# Altium PCB PCB_Exp_INDRA.PcbDoc
Units mil, origin at the board's own origin, x right, y up, seen from the top; angles counter-clockwise.
Board outline 1815 x 2261.8 mil, 2 copper layers (Top Layer, Bottom Layer); 53 components, 38 nets, 233 pads, 30 vias.
Unrouted connection lines stored in the file: 2.
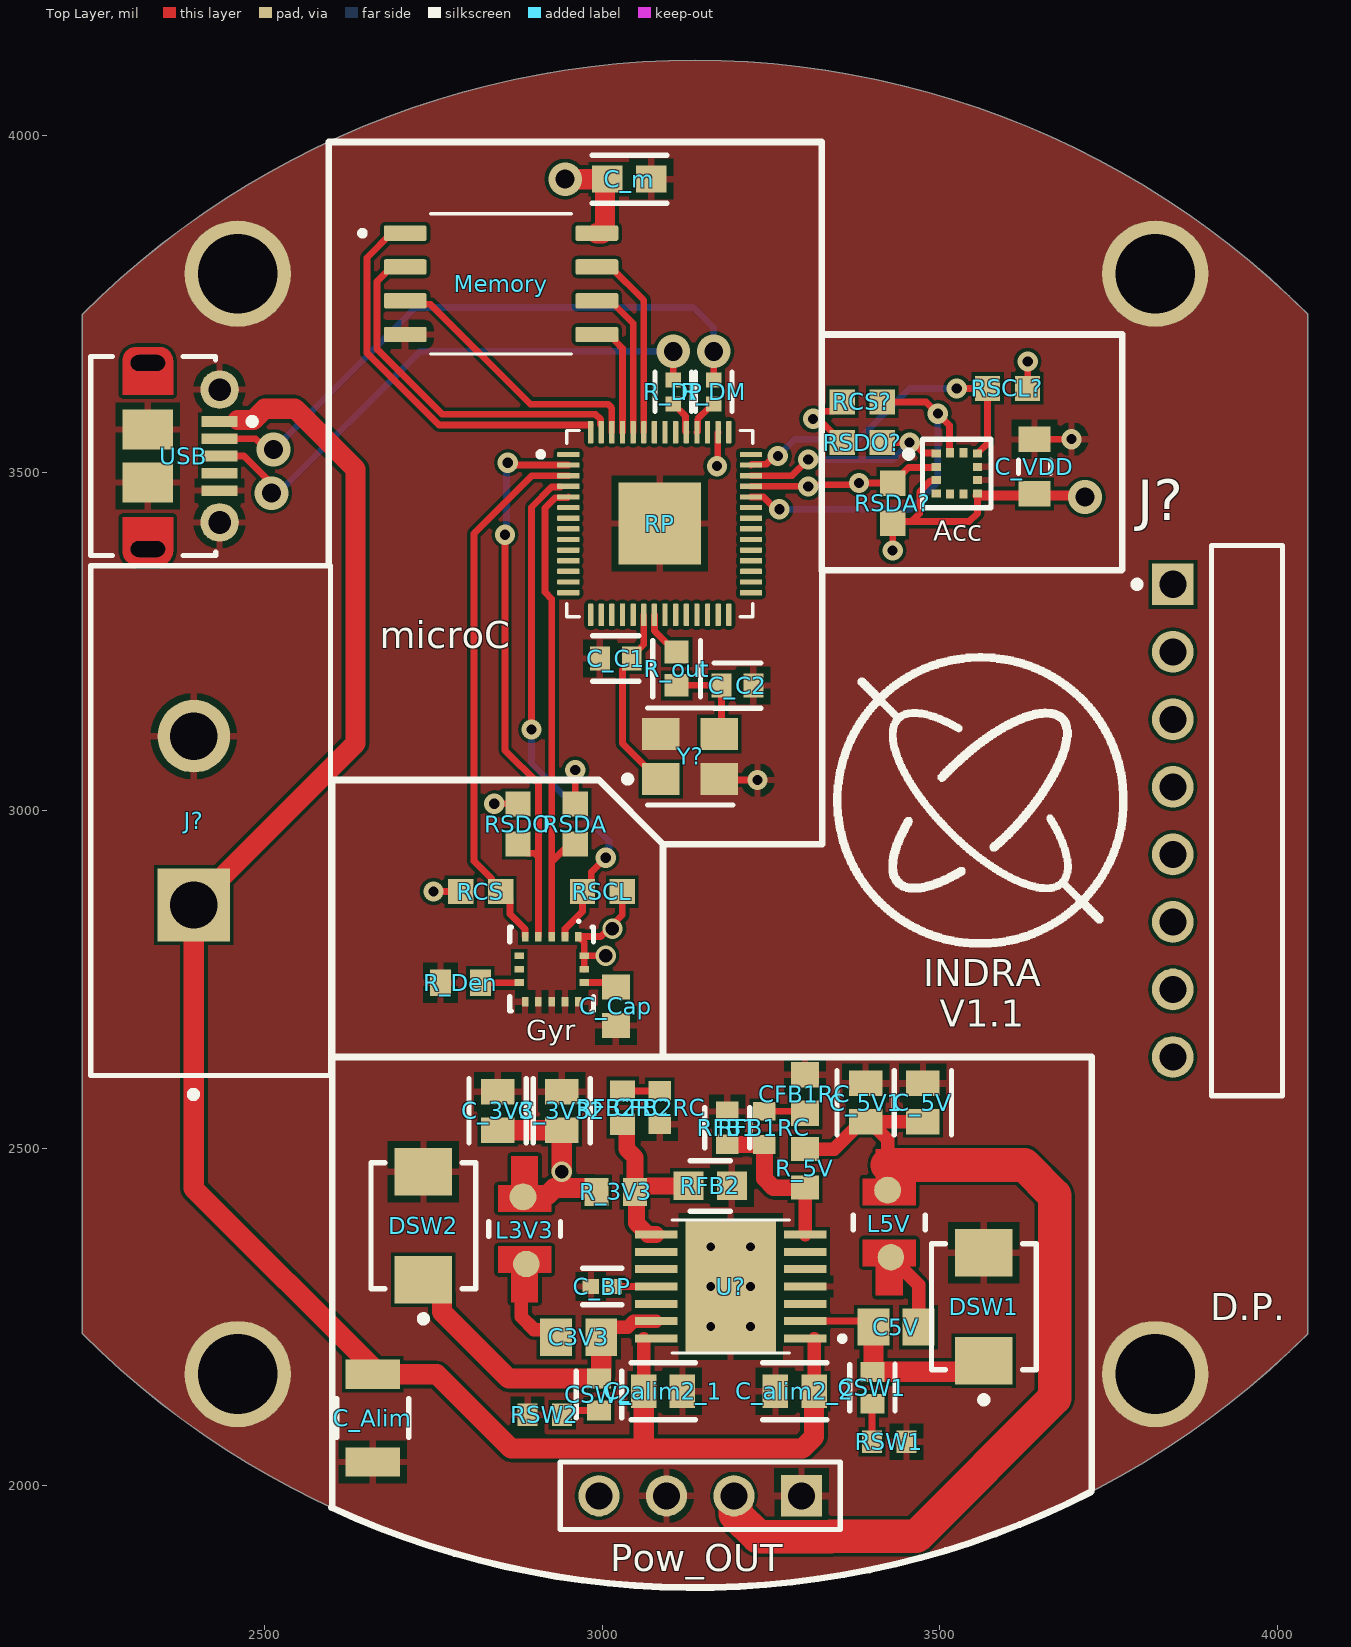
[diagram p0: Top Layer view]
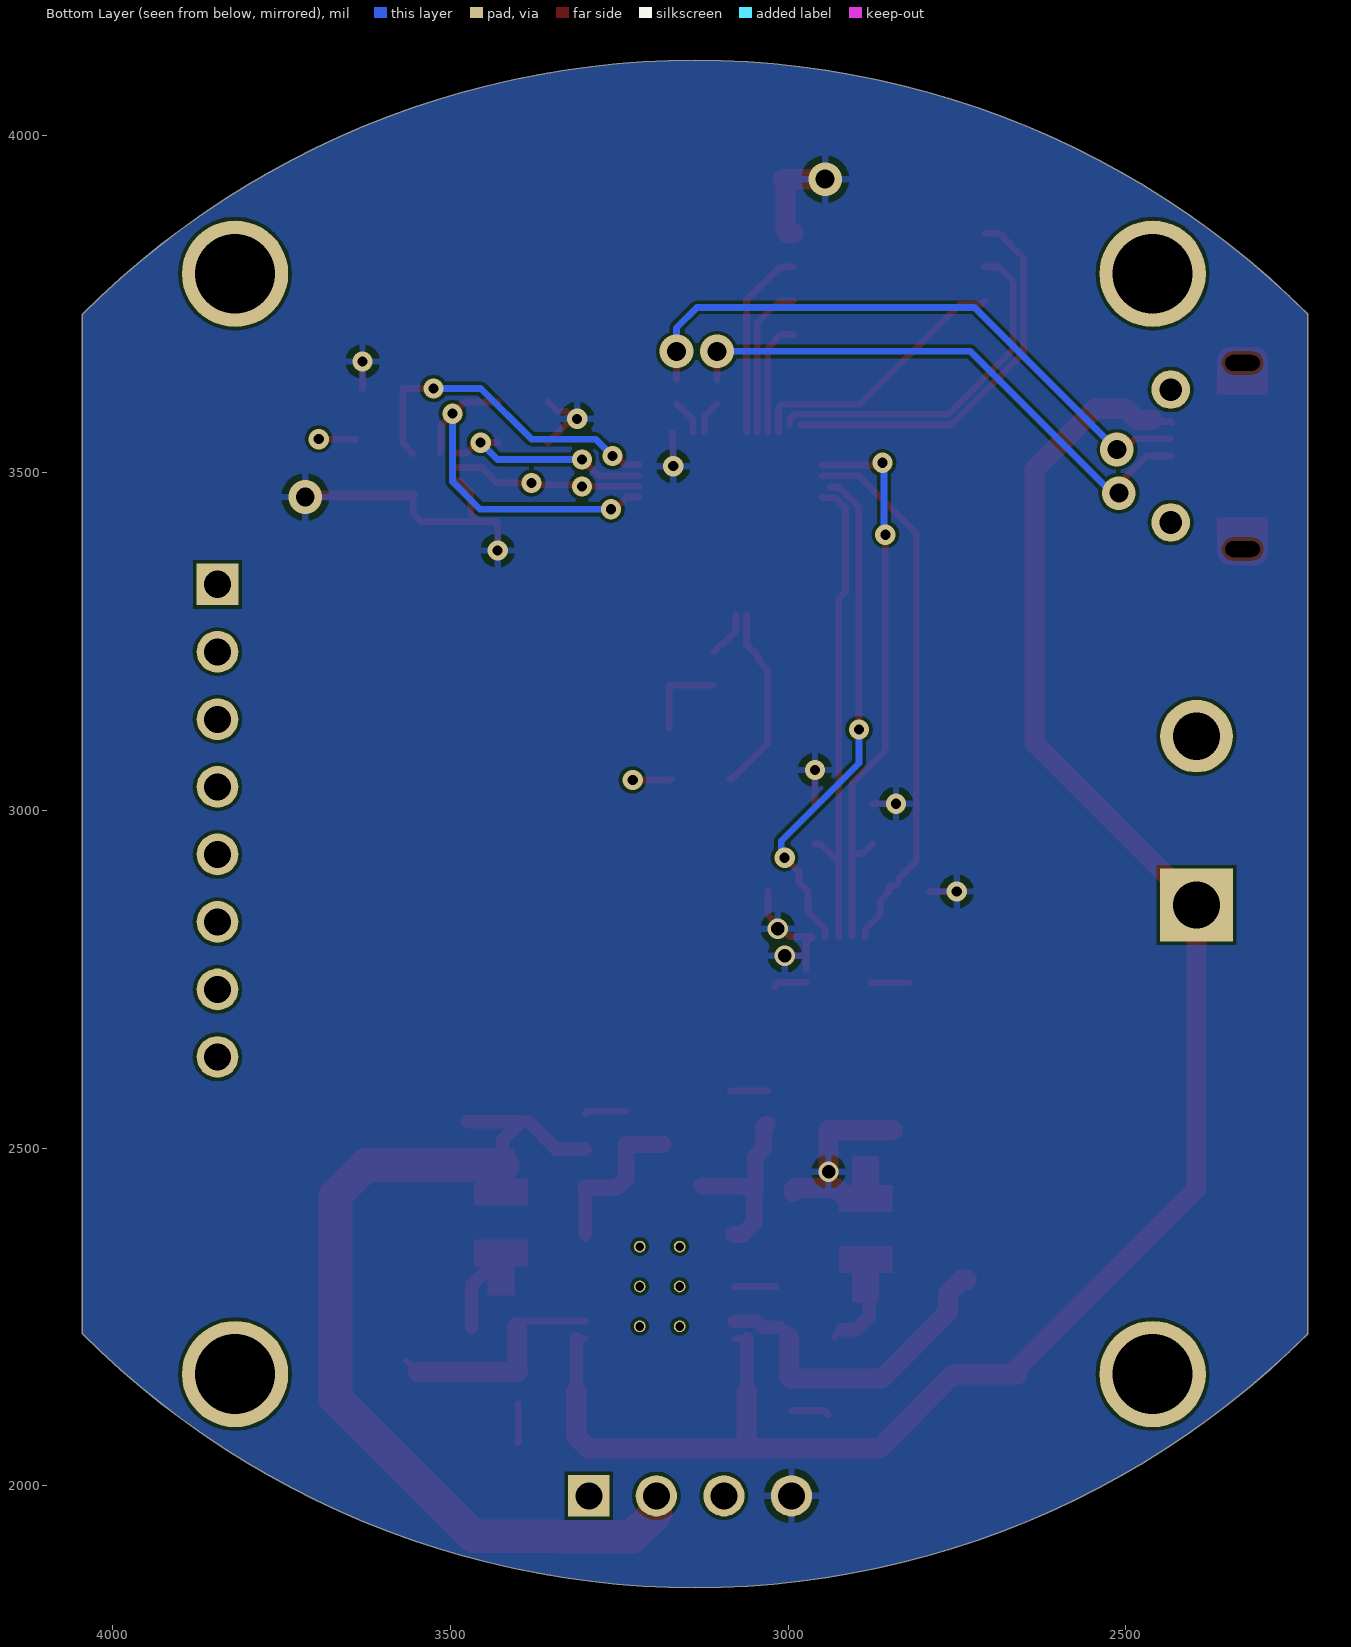
[diagram p1: Bottom Layer view, seen from below]
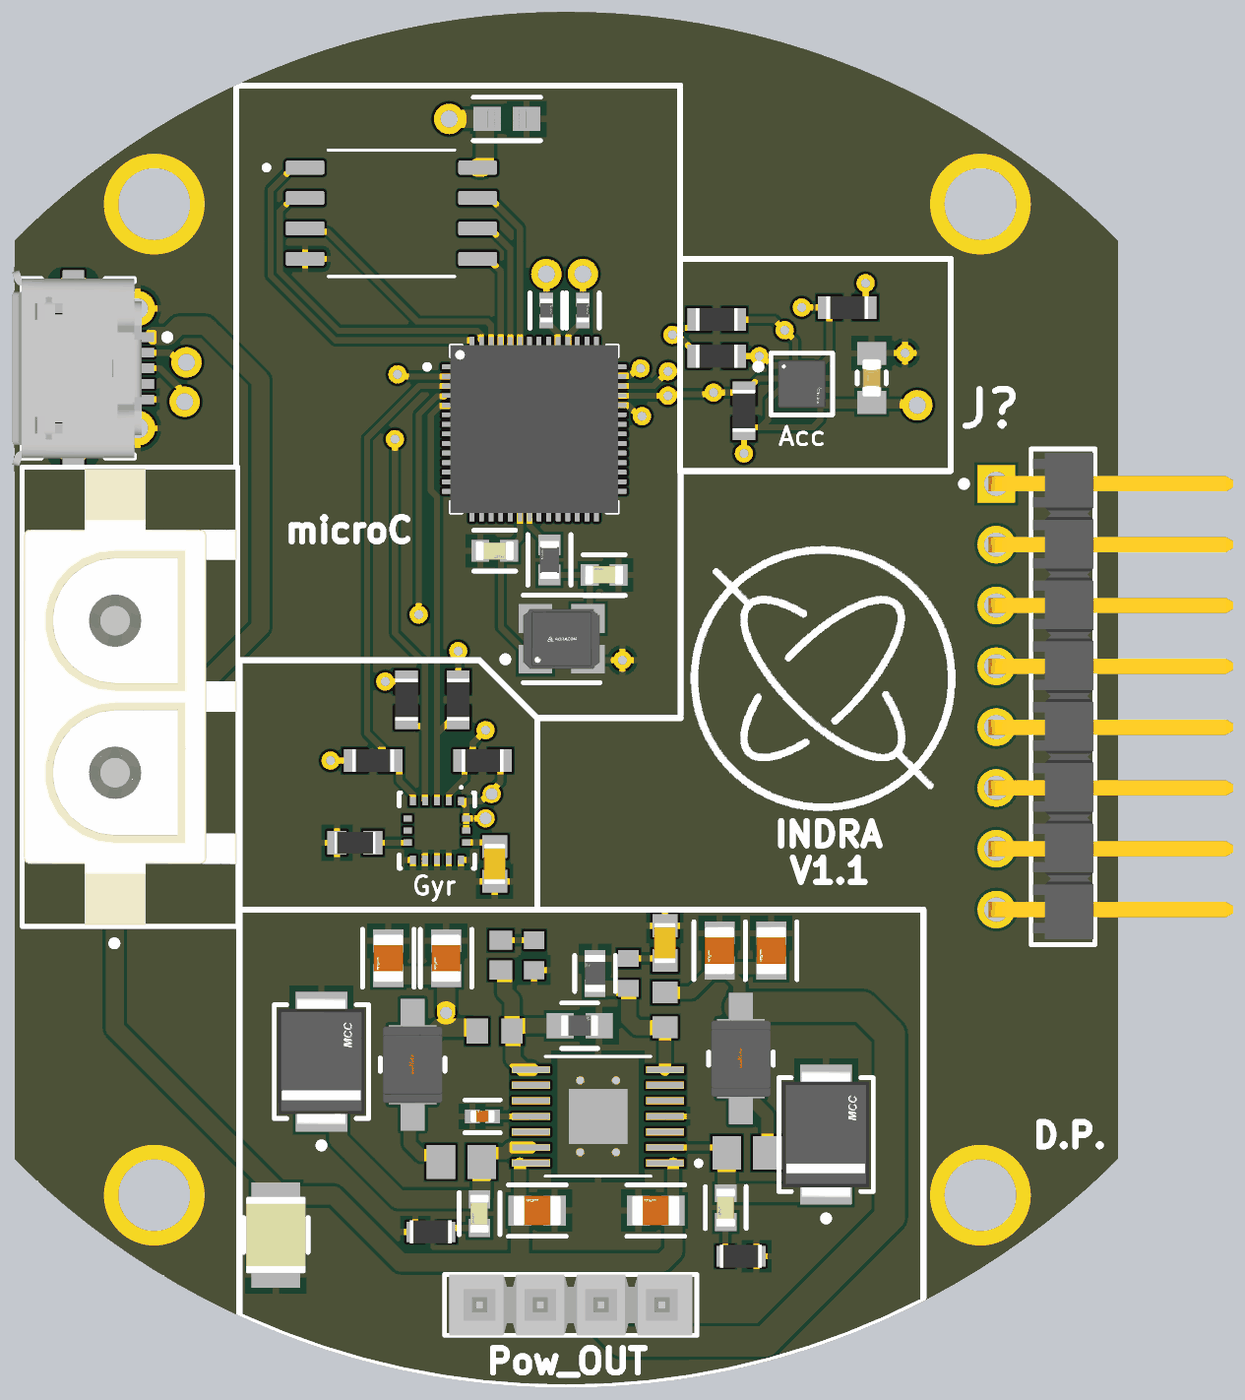
[diagram p2: 3D render of the assembled board from above, using the file's embedded part models]

## Layer stack, top to bottom
Top Solder: solder mask 0.4, Solder Resist, Dk 3.5
Top Layer: signal copper 1.4
Dielectric 1: dielectric 12.6, FR-4, Dk 4.8
Bottom Layer: signal copper 1.4
Bottom Solder: solder mask 0.4, Solder Resist, Dk 3.5

## Board outline
2230,2225 2230,3735 cw(c3137.5,2827.5) 4045,3735 4045,2225 cw(c3137.5,3132.5)

## Design rules (kind name [scope] priority, off if disabled: settings)
Clearance [All] p1: gap=5 ignorepadtopadclearanceinfootprint=FALSE
DiffPairsRouting [All] p1: maxlimit=10 minlimit=5 mostfreqgap=5 toplayer_minwidth=15 toplayer_maxwidth=15 toplayer_prefwidth=15 bottomlayer_minwidth=15 bottomlayer_maxwidth=15 bottomlayer_prefwidth=15 maxuncoupledlength=500
PolygonConnect [All] p1: connectstyle=Relief reliefconductorwidth=10 reliefentries=4 polygonreliefangle="90 Angle" airgapwidth=10
RoutingVias [All] p1: holewidth=28 width=50 viastyle="Through Hole" minholewidth=28 minwidth=50 maxholewidth=28 maxwidth=50
SolderMaskExpansion [All] p1: expansion=4 istentingtop=FALSE
Width [All] p1: maxlimit=50 minlimit=10 preferedwidth=10
29 further rules are at their usual default settings.

## Components (designator, comment, footprint, x,y, rotation, side; value= is the part's Value field where it differs from the comment)
Acc "BMA400" FP-BMA400-MFG 3525,3499.18 r0 top
C3V3 "GRM219R71H333KA01D" CAPC2013X95X45NL10T25 2965,2220 r180 top
C5V "GRM219R71H333KA01D" CAPC2013X95X45NL10T25 3435,2235 r0 top
C_3V3 "GRM21BR61C106KE15L" FP-GRM21B-0_1-IPC_C 2845,2555 r270 top
C_3V32 "GRM21BR61C106KE15L" FP-GRM21B-0_1-IPC_C 2940,2555 r270 top
C_5V "GRM21BR61C106KE15L" FP-GRM21B-0_1-IPC_C 3474.85,2567.48 r270 top
C_5V1 "GRM21BR61C106KE15L" FP-GRM21B-0_1-IPC_C 3389.85,2567.48 r270 top
C_Alim "GRM32ER60J107ME20L" FP-GRM32-0_3-MFG 2660,2100 r270 top value=100uF
C_alim2_1 "GRM21BR61C106KE15L" FP-GRM21B-0_1-IPC_C 3090,2140 r180 top
C_alim2_2 "GRM21BR61C106KE15L" FP-GRM21B-0_1-IPC_C 3285,2140 r180 top
C_BP "GRM155R60J475ME47D" FP-GRM155-0_1-IPC_B 3000,2295 r180 top
C_C1 "C0603C270J5GACTU" FP-C0603C-CF-MFG 3020,3225 r180 top value="27 pF"
C_C2 "C0603C270J5GACTU" FP-C0603C-CF-MFG 3200,3185 r0 top value="27 pF"
C_Cap "GRM188R71H103KA01D" CAPC1608X90X35ML10T15 3020,2710 r270 top
C_m "CL10B104KB8NNND" FP-CL10-IPC_A 3040,3935 r0 top
C_VDD "CGA3E2X7R1H104K080AA" FP-CGA3E-0_3-0_1-IPC_A 3640,3509.18 r90 top
CFB1RC "GRM188R71H103KA01D" CAPC1608X90X35ML10T15 3300,2580 r270 top
CFB2RC "GRM188R71H682KA01D" CAPC1608X90X35LL10T15 3085,2560 r270 top
CSW1 "C0603C471K5RACTU" FP-C0603C-CF-MFG 3400,2145 r90 top value="470 pF"
CSW2 "C0603C471K5RACTU" FP-C0603C-CF-MFG 2995,2135 r90 top value="470 pF"
DSW1 "SK36B-TP" FP-DO-214AA-MFG 3565,2265 r90 top
DSW2 "SK36B-TP" FP-DO-214AA-MFG 2735,2385 r90 top
Gyr "L3GD20H" STM-LGA-16 2925,2765 r270 top
J? "TSW-108-08-T-S-RA" FP-TSW-108-08-T-S-RA-MFG 3954.84,2985 r90 top
J? "350428-1" FP-350428-1-MFG 2420,2985 r90 top
L3V3 "LQH32CN220K23L" FP-LQH32CH_23-MFG 2885,2380 r90 top
L5V "LQH32CN220K23L" FP-LQH32CH_23-MFG 3425,2390 r90 top
Memory "W25Q128JVSIQ" SOIC127P790X216-8N 2850,3780 r0 top
Pow_OUT "TSW-104-08-G-S" SMTC-TSW-104-08-X-S 3295,1985 r180 top
R_3V3 "ERJ-3EKF2002V" RESC1608X55X30ML15T15 3020,2435 r0 top
R_5V "ERJ-3EKF2002V" RESC1608X55X30ML15T15 3300,2470 r90 top
R_Den "Resistor 100k +/-1% 0603 100 mW" RESC1608X55X25ML10T15 2790,2745 r0 top value=100k
R_DM "ERJ-2RKF27R0X" FP-ERJ2R-IPC_B 3165,3620 r90 top
R_DP "ERJ-2RKF27R0X" FP-ERJ2R-IPC_B 3105,3620 r90 top
R_out "ERA-3AEB102V" FP-ERA3A-IPC_C 3110,3210 r90 top
RCS "ERJ-3EKF4701V" RESC1608X55X30NL15T15 2820,2880 r180 top
RCS? "ERJ-3EKF4701V" RESC1608X55X30NL15T15 3385,3605 r180 top
RFB1 "CRCW06033K83FKEA" FP-CRCW0603-e3-IPC_C 3185,2530 r90 top
RFB1RC "ERJ-3EKF4220V" RESC1608X55X30LL15T15 3240,2530 r90 top
RFB2 "CRCW06036K34FKEA" FP-CRCW0603-e3-IPC_A 3159.76,2444.09 r0 top
RFB2RC "CRCW0603698RFKEA" RESC1609X50X30NL10T20 3030,2560 r90 top
RP "RP2040" QFN40P700X700X90-57N 3085,3425 r0 top
RSCL "ERJ-3EKF4701V" RESC1608X55X30NL15T15 3000,2880 r0 top
RSCL? "ERJ-3EKF4701V" RESC1608X55X30NL15T15 3600,3625 r0 top
RSDA "ERJ-3EKF4701V" RESC1608X55X30NL15T15 2960,2980 r90 top
RSDA? "ERJ-3EKF4701V" RESC1608X55X30NL15T15 3430,3455 r270 top
RSDO "ERJ-3EKF4701V" RESC1608X55X30NL15T15 2875,2980 r90 top
RSDO? "ERJ-3EKF4701V" RESC1608X55X30NL15T15 3385,3545 r180 top
RSW1 "ERJ3EKF1002V" RESC1609X55X30LL15T15 3425,2065 r180 top
RSW2 "ERJ3EKF1002V" RESC1609X55X30LL15T15 2915,2105 r0 top
U? "TPS54283PWPR" IC_TPS27S100BPWPR 3190,2295 r180 top
USB "105017-0001" USB-MICRO-B_V 2380,3525 r270 top
Y? "ABM8G-12.000MHZ-18-D2Y-T" FP-ABM8G-MFG 3130,3080 r0 top

## Footprints (in the part's own frame and the unit in brackets; to place one, negate y for a bottom-side part, rotate by r counter-clockwise, add the part's x,y. Pads: shape width x height; smd on the part's side, far side on the other; paste and mask are expansions set on the pad)
CAPC1608X90X35LL10T15 [mm] "Chip Capacitor, 2-Leads, Body 1.60x0.80mm, IPC High Density"
  rect 0.75x0.85 smd: 1(-0.625,0) 2(0.625,0)
  body extent -0.85,-0.45 0.85,0.45, height 0.9
CAPC1608X90X35ML10T15 [mm] "Chip Capacitor, 2-Leads, Body 1.7x0.9mm, IPC Low Density"
  rect 0.95x1.05 smd: 1(-0.725,0) 2(0.725,0)
  body extent -0.85,-0.45 0.85,0.45, height 0.9
CAPC2013X95X45NL10T25 [mm] "Chip Capacitor, 2-Leads, Body 2.00x1.25mm, IPC Medium Density"
  rect 1.2x1.4 smd: 1(-0.85,0) 2(0.85,0)
  body extent -1.05,-0.67 1.05,0.67, height 0.95
FP-350428-1-MFG [mm]
  rect 2.73x2.73 hole 1.78 paste-1000 mask+0: 1(-3.175,0.635)
  round 2.73 hole 1.78 paste-1000 mask+0: 2(3.175,0.635)
  silkscreen extent -10.42,-4.51 9.59,4.51, body extent -9.69,-4.61 9.69,4.61, height 0.25
FP-ABM8G-MFG [mm]
  rect 1.4x1.2 smd paste+0 mask+0: 1(-1.1,-0.85) 2(1.1,-0.85) 3(1.1,0.85) 4(-1.1,0.85)
  silkscreen extent -2.47,-1.83 1.6,1.83, body extent -1.9,-1.55 1.9,1.55, height 0.25
FP-BMA400-MFG [mm]
  rect 0.35x0.3 smd paste-1000 mask-1000: 1(-0.775,0.75) 2(-0.775,0.25) 3(-0.775,-0.25) 4(-0.775,-0.75) 7(0.775,-0.75) 8(0.775,-0.25) 9(0.775,0.25) 10(0.775,0.75)
  rect 0.3x0.35 smd paste-1000 mask-1000: 5(-0.25,-0.775) 6(0.25,-0.775) 11(0.25,0.775) 12(-0.25,0.775)
  silkscreen extent -1.94,-1.29 1.29,1.29, body extent -1.54,-1.54 1.54,1.54, height 0.25
FP-C0603C-CF-MFG [mm]
  rect 0.75x0.9 smd paste+0 mask+0: 1(-0.6,0) 2(0.6,0)
  silkscreen extent -0.87,-0.85 0.88,0.85, body extent -1.2,-0.6 1.2,0.6, height 0.25
FP-CGA3E-0_3-0_1-IPC_A [mm]
  rect 0.956x1.206 smd paste+0 mask+0: 1(-1.025,0) 2(1.025,0)
  silkscreen extent -0.25,-0.6 0.25,0.6, body extent -2,-1.1 2,1.1, height 0.25
FP-CL10-IPC_A [mil]
  rect 45.6x39.85 smd paste+0 mask+0: 1(-32.56,0) 2(32.56,0)
  silkscreen extent -55,-36 55,36, body extent -75,-40 75,40, height 10
FP-CRCW0603-e3-IPC_A [mil]
  rect 44.69x41.82 smd paste+0 mask+0: 1(-32.1,0) 2(32.1,0)
  silkscreen extent -30,-37 30,37, body extent -74,-41 74,41, height 10
FP-CRCW0603-e3-IPC_C [mil]
  rect 28.94x33.94 smd paste+0 mask+0: 1(-24.23,0) 2(24.23,0)
  silkscreen extent -30,-33 30,33, body extent -43,-23 43,23, height 10
FP-DO-214AA-MFG [mil]
  rect 70x85 smd paste+0 mask+0: 1(-80,0) 2(80,0)
  silkscreen extent -143,-78 94,78, body extent -119,-81 119,81, height 10
FP-ERA3A-IPC_C [mil]
  rect 33.66x35.68 smd paste+0 mask+0: 1(-24.63,0) 2(24.63,0)
  silkscreen extent -41,-35 41,35, body extent -45,-24 45,24, height 10
FP-ERJ2R-IPC_B [mil]
  rect 22.37x22.54 smd paste+0 mask+0: 1(-17.8,0) 2(17.8,0)
  silkscreen extent -29,-27 29,27, body extent -35,-17 35,17, height 10
FP-GRM21B-0_1-IPC_C [mil]
  rect 37.71x49.69 smd paste+0 mask+0: 1(-28.63,0) 2(28.63,0)
  silkscreen extent -47,-42 47,42, body extent -51,-31 51,31, height 10
FP-GRM32-0_3-MFG [mm]
  rect 1.1x2.05 smd paste+0 mask+0: 1(-1.65,0) 2(1.65,0)
  silkscreen extent -0.72,-1.35 0.72,1.35, body extent -2.3,-1.45 2.3,1.45, height 0.25
FP-GRM155-0_1-IPC_B [mil]
  rect 24.23x22.54 smd paste+0 mask+0: 1(-16.87,0) 2(16.87,0)
  silkscreen extent -29,-27 29,27, body extent -35,-17 35,17, height 10
FP-LQH32CH_23-MFG [mil]
  round 39.16 smd paste+0 mask+0: 1(-51.67,-2.46)
  round 39.86 smd paste+0 mask+0: 2(47.74,2.46)
  Top Layer region: 25.59,-39.37 25.59,39.37 64.96,39.37 64.96,19.68 108.27,19.68 108.27,-19.68 64.96,-19.68 64.96,-39.37
  Top Layer region: -64.96,-39.37 -64.96,-19.68 -108.27,-19.68 -108.27,19.68 -64.96,19.68 -64.96,39.37 -25.59,39.37 -25.59,-39.37
  silkscreen extent -11,-53 11,53, body extent -112,-57 112,57, height 10
FP-TSW-108-08-T-S-RA-MFG [mm]
  rect 1.57x1.57 hole 1.02 paste-1000 mask+0: 1(8.89,2.79)
  round 1.57 hole 1.02 paste-1000 mask+0: 2(6.35,2.79) 3(3.81,2.79) 4(1.27,2.79) 5(-1.27,2.79) 6(-3.81,2.79) 7(-6.35,2.79) 8(-8.89,2.79)
  silkscreen extent -10.35,-1.34 10.35,4.26, body extent -10.45,-7.47 10.45,3.67, height 0.25
IC_TPS27S100BPWPR [mm]
  rect 1.6x0.3 smd paste-2: 1(-2.8,1.95) 2(-2.8,1.3) 3(-2.8,0.65) 4(-2.8,0) 5(-2.8,-0.65) 6(-2.8,-1.3) 7(-2.8,-1.95) 8(2.8,-1.95) 9(2.8,-1.3) 10(2.8,-0.65) 11(2.8,0) 12(2.8,0.65) 13(2.8,1.3) 14(2.8,1.95)
  rect 3.4x5 smd paste-3 mask+0: 15(0,0)
  round 0.44 hole 0.33 mask+0: 16(-0.75,1.5) 17(0.75,1.5) 20(-0.75,-1.5) 21(0.75,-1.5)
  round 0.44 hole 0.33: 18(-0.75,0) 19(0.75,0)
  silkscreen extent -4.3,-2.5 2.2,2.5
QFN40P700X700X90-57N [mm]
  rrect25% 0.84x0.2 smd: 1(-3.435,2.6) 2(-3.435,2.2) 3(-3.435,1.8) 4(-3.435,1.4) 5(-3.435,1) 6(-3.435,0.6) 7(-3.435,0.2) 8(-3.435,-0.2) 9(-3.435,-0.6) 10(-3.435,-1) 11(-3.435,-1.4) 12(-3.435,-1.8) 13(-3.435,-2.2) 14(-3.435,-2.6) 29(3.435,-2.6) 30(3.435,-2.2) 31(3.435,-1.8) 32(3.435,-1.4) 33(3.435,-1) 34(3.435,-0.6) 35(3.435,-0.2) 36(3.435,0.2) 37(3.435,0.6) 38(3.435,1) 39(3.435,1.4) 40(3.435,1.8) 41(3.435,2.2) 42(3.435,2.6)
  rrect25% 0.2x0.84 smd: 15(-2.6,-3.435) 16(-2.2,-3.435) 17(-1.8,-3.435) 18(-1.4,-3.435) 19(-1,-3.435) 20(-0.6,-3.435) 21(-0.2,-3.435) 22(0.2,-3.435) 23(0.6,-3.435) 24(1,-3.435) 25(1.4,-3.435) 26(1.8,-3.435) 27(2.2,-3.435) 28(2.6,-3.435) 43(2.6,3.435) 44(2.2,3.435) 45(1.8,3.435) 46(1.4,3.435) 47(1,3.435) 48(0.6,3.435) 49(0.2,3.435) 50(-0.2,3.435) 51(-0.6,3.435) 52(-1,3.435) 53(-1.4,3.435) 54(-1.8,3.435) 55(-2.2,3.435) 56(-2.6,3.435)
  rect 3.1x3.1 smd paste-0.57: 57(0,0)
  silkscreen extent -4.57,-3.5 3.5,3.5, body extent -3.5,-3.5 3.5,3.5, height 0.9
RESC1608X55X25ML10T15 [mm] "Chip Resistor, 2-Leads, Body 1.70x0.90mm, IPC Low Density"
  rect 0.8x1 smd: 1(-0.75,0) 2(0.75,0)
  body extent -0.85,-0.45 0.85,0.45, height 0.55
RESC1608X55X30LL15T15 [mm] "Chip Resistor, 2-Leads, Body 1.60x0.80mm, IPC High Density"
  rect 0.7x0.85 smd: 1(-0.625,0) 2(0.625,0)
  body extent -0.87,-0.48 0.87,0.48, height 0.55
RESC1608X55X30ML15T15 [mm] "Chip Resistor, 2-Leads, Body 1.60x0.80mm, IPC Low Density"
  rect 0.9x1.05 smd: 1(-0.725,0) 2(0.725,0)
  body extent -0.87,-0.48 0.87,0.48, height 0.55
RESC1608X55X30NL15T15 [mm] "Chip Resistor, 2-Leads, Body 1.75x0.95mm, IPC Medium Density"
  rect 0.95x0.95 smd: 1(-0.75,0) 2(0.75,0)
  body extent -0.87,-0.48 0.87,0.48, height 0.55
RESC1609X50X30NL10T20 [mm] "Chip Resistor, 2-Leads, Body 1.55x0.85mm, IPC Medium Density"
  rect 0.8x0.95 smd: 1(-0.625,0) 2(0.625,0)
  body extent -0.82,-0.48 0.82,0.48, height 0.5
RESC1609X55X30LL15T15 [mm] "Chip Resistor, 2-Leads, Body 1.75x0.95mm, IPC High Density"
  rect 0.75x0.85 smd: 1(-0.65,0) 2(0.65,0)
  body extent -0.87,-0.48 0.87,0.48, height 0.55
SMTC-TSW-104-08-X-S [mm] ".025 SQ Post Terminal Strip Assembly, 1x4 Pins, Vertical, 2.54mm Pitch, Male"
  rect 1.55x1.55 hole 1.02: 1(0,0)
  round 1.55 hole 1.02: 2(2.54,0) 3(5.08,0) 4(7.62,0)
  silkscreen extent -1.46,-1.27 9.08,1.27, body extent -1.27,-1.27 8.89,1.27, height 8.38
SOIC127P790X216-8N [mm]
  rrect25% 1.61x0.58 smd: 1(-3.605,1.905) 2(-3.605,0.635) 3(-3.605,-0.635) 4(-3.605,-1.905) 5(3.605,-1.905) 6(3.605,-0.635) 7(3.605,0.635) 8(3.605,1.905)
  silkscreen extent -5.31,-2.64 2.64,2.64
STM-LGA-16 [mm] "LGA, 16-Leads, Body 3x3mm, Pitch 0.5mm"
  rect 0.35x0.25 smd: 1(-1.225,1) 2(-1.225,0.5) 3(-1.225,0) 4(-1.225,-0.5) 5(-1.225,-1) 9(1.225,-1) 10(1.225,-0.5) 11(1.225,0) 12(1.225,0.5) 13(1.225,1)
  rect 0.25x0.35 smd: 6(-0.5,-1.225) 7(0,-1.225) 8(0.5,-1.225) 14(0.5,1.225) 15(0,1.225) 16(-0.5,1.225)
  silkscreen extent -1.85,-1.58 1.58,1.58, body extent -1.5,-1.5 1.5,1.5, height 1
USB-MICRO-B_V [mm] "USB, MICRO B, Body 7.491x4.695 mm, Pitch 0.65 mm"
  rect 0.4x1.35 smd: 1(-1.3,1.35) 2(-0.65,1.35) 3(0,1.35) 4(0.65,1.35) 5(1.3,1.35)
  round 1.45 hole 0.85: 6(-2.5,1.35) 7(2.5,1.35)
  rrect50% 0x0 hole 0.6 slot 1.3 at 90 deg: 8(-3.5,-1.35) 11(3.5,-1.35)
  rect 1.5x1.9 smd: 9(-1,-1.35) 10(1,-1.35)
  Top Layer circle w0.5: c-3.6,-1.8 r0.25
  Top Layer circle w0.5: c-3.6,-0.9 r0.25
  Top Layer circle w0.5: c3.6,-1.8 r0.25
  Top Layer circle w0.5: c3.6,-0.9 r0.25
  Top Layer region: -3.6,-1.8 -3.6,-0.9 -4.1,-0.9 -4.1,-1.8
  Top Layer region: 3.6,-0.9 3.6,-1.8 4.1,-1.8 4.1,-0.9
  Top Layer region: 2.3,-0.4 2.3,-2.3 3.6,-2.3 3.6,-0.4
  Top Layer region: -2.3,-2.3 -2.3,-0.4 -3.6,-0.4 -3.6,-2.3
  silkscreen extent -3.75,-3.5 3.75,2.7, body extent -4.1,-3.9 4.1,1.5, height 2.67

## Part data
Acc: library part CMP-191065-000001-1, "ACCELEROMETER 2-16G 12LGA", Ambient Temperature Range High=+85°C, Ambient Temperature Range Low=-40°C, Manufacturer="Bosch Sensortec", Max Supply Voltage=3.6V, Min Supply Voltage=1.2V, Operating Supply Current=14.5uA, Package=0, Temperature="-40°C to +85°C", Accel Axis="X+Y and Z", Accel Range=2/4/8/16g, Accel Resolution=12bits, Accel Sensitivity=128/256/512/1024LSB/g, Automotive=No, Category=IC, ComponentLink2Description=Datasheet, ComponentLink2URL=https://ae-bst.resource.bosch.com/media/_tech/media/datasheets/BST-BMA400-DS000.pdf, Device Class L1=Sensors, Device Class L2="Motion Sensors", Device Class L3=Accelerometers, Digikey Description="ACCELEROMETER 2-16G 12LGA", Height=1mm, Lead Free=Yes, Manufacturer Part Number=BMA400, Mouser Description="BMA400 Series 3.6 V ±2g/4g/8g/16g 3 Axes Ultra Low Power Accelerometer - LGA-12", Octopart=https://octopart.com/bma400-bosch+sensortec-106101410, RoHS=TRUE, Sensor Output=I2C,SPI, Temperature Range High=+85°C, Temperature Range Low=-40°C
C3V3 C5V: library part CMP-1036-04169-2, Manufacturer=Murata, Part Number=GRM219R71H333KA01D
C_3V3 C_3V32 C_5V C_5V1 C_alim2_1 C_alim2_2: library part CMP-2007-03453-2, "Chip Multilayer Ceramic Capacitors for General Purpose, 0805, 10uF, X5R, 15%, 10%, 16V", Capacitance=10uF, Case Code (Imperial)=0805, Case Code (Metric)=2012, Dielectric=X5R, Max Operating Temperature=85°C, Min Operating Temperature=-55°C, Package Quantity=1, Tolerance=10%, Voltage=16V, Case/Package=0805, Depth=1.25mm, Height=1.25mm, Lead Free="Lead Free", Length=2mm, Material=Ceramic, Mount="Surface Mount", Packaging="Tape and Reel", Radiation Hardening=No, REACH SVHC="No SVHC", Termination=SMD/SMT, Thickness=0.053inch, Voltage Rating=16V, Voltage Rating (DC)=16V, Width=1.25mm
C_Alim: library part CMP-2000-05259-2, "CAP CER 100UF 6.3V X5R 1210", 3DS Part Number=220-00002, Capacitance=100uF, Manufacturer=Murata, Package=GRM32-0.3, Temperature="-55°C to +85°C", Temperature Characteristic=X5R, Temperature Coefficient=15%, Temperature Range High=+85°C, Temperature Range Low=-55°C, Tolerance=20%, Voltage=6.3V, Automotive=No, Category=Cap, ComponentLink2Description=Datasheet, ComponentLink2URL=https://search.murata.co.jp/Ceramy/image/img/A01X/G101/ENG/GRM32ER60J107ME20-01.pdf, Device Class L1="Passive Components", Device Class L2=Capacitors, Device Class L3="Ceramic Capacitors", Digikey Description="CAP CER 100UF 6.3V X5R 1210", Height=2.7mm, Ipc Land Pattern Name=CAPC320250X250, Lead Free=Yes, Manufacturer Part Number=GRM32ER60J107ME20L, Material=Ceramic, Octopart=https://octopart.com/grm32er60j107me20l-murata-197007, RoHS=TRUE, Voltage Rating=6.3V
C_BP: library part CMP-2008-04549-2, "Chip Multilayer Ceramic Capacitors for General Purpose, 0402, 4.7uF, X5R, 15%, 20%, 6.3V", Capacitance=4.7uF, Case Code (Imperial)=0402, Case Code (Metric)=1005, Dielectric=X5R, Max Operating Temperature=85°C, Min Operating Temperature=-55°C, Package Quantity=10000, Tolerance=20%, Voltage=6.3V, Case/Package=0402, Contact Plating=Tin, Depth=0.5mm, Height=0.5mm, Lead Free="Lead Free", Length=1mm, Mount="Surface Mount", Packaging="Tape and Reel", REACH SVHC="No SVHC", Termination=SMD/SMT, Thickness=0.022inch, Voltage Rating=6.3V, Voltage Rating (DC)=6.3V, Weight=0.000212oz, Width=0.02inch
C_C1 C_C2: library part CMP-2006-03314-2, "CAP CER 27PF 50V C0G/NP0 0603", Capacitance="27 pF", Manufacturer=KEMET, Package=C0603C-CF, Temperature="-55°C to +125°C", Temperature Characteristic=C0G, Temperature Coefficient=30ppm/°C, Temperature Range High=+125°C, Temperature Range Low=-55°C, Tolerance=0.05, Voltage Rating="50 V", Automotive=Yes, Automotive Grade="Grade 1", Category=Cap, ComponentLink2Description=Datasheet, ComponentLink2URL=https://api.kemet.com/component-edge/download/datasheet/C0603C100J5GACAUTO.pdf, Device Class L1="Passive Components", Device Class L2=Capacitors, Device Class L3="Ceramic Capacitors", Digikey Description="CAP CER 27PF 50V C0G/NP0 0603", Height=0.87mm, Lead Free=Yes, Manufacturer Part Number=C0603C270J5GACTU, Material=Ceramic, Mouser Description="Multilayer Ceramic Capacitors MLCC - SMD/SMT 50volts 27pF C0G 5%", Octopart=https://octopart.com/c0603c270j5gactu-kemet-136059, RoHS=TRUE
C_Cap CFB1RC: library part CMP-2100-03642-1, "Chip Capacitor, 10 nF, +/- 10%, 50 V, -55 to 125 degC, 0603 (1608 Metric), RoHS, Tape and Reel", Capacitance=10nF, Case Code (Imperial)=0603, Case Code (Metric)=1608, Dielectric=X7R, Dielectric Material=Ceramic, Insulation Resistance=10GR, Manufacturer=Murata, Max Operating Temperature=125degC, Min Operating Temperature=-55degC, Package Description="2-Pin Surface Mount Device, Body 1.6 x 0.8 mm", Package Quantity=1, Tolerance=10%, Voltage=50V, Case/Package=0603, Datasheet URL=http://search.murata.co.jp/Ceramy/image/img/A01X/G101/ENG/GRM188R71H103KA01-01.pdf, Datasheet Version=42401.0, Depth=0.8mm, Height=0.8mm, Lead Free=LeadFree, Length=1.6mm, Manufacturer URL=http://www.murata.com/, Material=Ceramic, Mount=SurfaceMount, Number of Pins=2, Package Reference=0603, Packaging=TapeandReel, REACH SVHC=Unknown, RoHSCompliant=True, Termination=SMD/SMT, Thickness=0.035inch, Voltage Rating=50V, Voltage Rating (DC)=50V, Width=0.031inch
C_m: library part CMP-13271-000587-1, "Cap Ceramic 100nF 50V X7R ±10% Pad SMD 0603 +125°C T/R", Capacitance=100nF, Case/Package=0603, Dielectric=X7R, Max Operating Temperature=125°C, Min Operating Temperature=-55°C, Package Quantity=10000, Tolerance=10%, Voltage=50V, Depth=0.8mm, Height=0.8mm, Lead Free="Lead Free", Length=1.6mm, Material=Ceramic, Mount="Surface Mount", Packaging="Tape and Reel", Radiation Hardening=No, Thickness=0.035inch, Voltage Rating=50V, Voltage Rating (DC)=50V, Width=0.031inch
C_VDD: library part CMP-2000-07546-2, "Cap Ceramic 100nF 50V X7R 10% Pad SMD 0603 +125°C Automotive T/R", Capacitance=100nF, Case Code (Imperial)=0603, Case Code (Metric)=1608, Dielectric=X7R, Max Operating Temperature=125°C, Min Operating Temperature=-55°C, Package Quantity=1, Ratings=AEC-Q200, Tolerance=10%, Voltage=50V, Case/Package=0603, Composition=Ceramic, Depth=0.8mm, Height=0.8mm, Lead Free="Lead Free", Length=1.6mm, Mount="Surface Mount", Packaging="Tape and Reel", Radiation Hardening=No, REACH SVHC="No SVHC", Termination=SMD/SMT, Thickness=0.035inch, Voltage Rating=50V, Voltage Rating (DC)=50V, Weight=7.1E-05oz, Width=0.8mm
CFB2RC: library part CMP-2006-02934-1, Manufacturer=Murata, Part Number=GRM188R71H682KA01D
CSW1 CSW2: library part CMP-2006-03816-2, "CAP CER 470PF 50V X7R 0603", Capacitance="470 pF", Manufacturer=KEMET, Package=C0603C-CF, Temperature="-55°C to +125°C", Temperature Characteristic=X7R, Temperature Coefficient=30ppm/°C, Temperature Range High=+125°C, Temperature Range Low=-55°C, Tolerance=0.1, Voltage Rating="50 V", Automotive=Yes, Automotive Grade="Grade 1", Category=Cap, ComponentLink2Description=Datasheet, ComponentLink2URL=https://api.kemet.com/component-edge/download/datasheet/C0603C100J5GACAUTO.pdf, Device Class L1="Passive Components", Device Class L2=Capacitors, Device Class L3="Ceramic Capacitors", Digikey Description="CAP CER 470PF 50V X7R 0603", Height=0.87mm, Lead Free=Yes, Manufacturer Part Number=C0603C471K5RACTU, Material=Ceramic, Mouser Description="Ceramic Capacitor, 470Pf, 50V, X7R, 10%, 0603, Full Reel", Octopart=https://octopart.com/c0603c471k5ractu-kemet-89311, RoHS=TRUE
DSW1 DSW2: library part CMP-56206-000011-1, "DIODE SCHOTTKY 60V 3A DO214AA", Average Rectified Current=3A, Capacitance=45pF, Case/Package=DO-214AA, Forward Voltage=750mV, Max Forward Surge Current (Ifsm)=100A, Max Operating Temperature=125°C, Max Repetitive Reverse Voltage (Vrrm)=60V, Max Reverse Current=20mA, Max Reverse Leakage Current=500uA, Min Operating Temperature=-55°C, Package Quantity=1, Current Rating=3A, Element Configuration=Single, Forward Current=3A, Height=2.44mm, Lead Free="Lead Free", Length=4.57mm, Max Reverse Voltage (DC)=60V, Max Surge Current=100A, Mount="Surface Mount", Number of Pins=2, Output Current=3A, Packaging="Tape and Reel", Peak Non-Repetitive Surge Current=100A, Polarity=Standard, Radiation Hardening=No, RoHS Compliant=Yes, Voltage Rating (DC)=60V, Width=3.94mm
Gyr: library part CMP-1771-00002-2, "MEMS Motion Sensor: Three-Axis Digital Output Gyroscope, 2.2 to 3.6 V, -40 to 85 degC, 16-Pin LGA, RoHS, Tray", Capacitance="1.8E-11 f", Case/Package=CSMD, Frequency="8 MHz", Frequency Tolerance=20ppm, Load Capacitance="18 pF", Max Operating Temperature=70degC, Min Operating Temperature=-20degC, Package Quantity=1000, Resistance="200 Ohm", ComponentLink1Description="Manufacturer URL", ComponentLink1URL=http://www.st.com/, ComponentLink2Description=Datasheet, ComponentLink2URL=http://www.st.com/content/ccc/resource/technical/document/datasheet/35/b1/e0/39/71/57/43/01/DM00060659.pdf/files/DM00060659.pdf/jcr:content/translations/en.DM00060659.pdf, DatasheetVersion="Rev. 2, 03/2013", ESR="200 Ohm", Height="0.043 inch", Length="0.197 inch", Mount="Surface Mount", PackageDescription="16-Pin Land Grid Array Package, Body 3 x 3 mm, Pitch 0.5 mm", PackageReference=LGA-16, Packaging="Tape and Reel", Pins=4, REACH SVHC=Unknown, RoHSCompliant=True, Tolerance=20ppm, Width="0.126 inch"
J?: library part CMP-02766-001402-1, "CONN HEADER R/A 8POS 2.54MM", Color=Black, Max Current Rating=7.6A, Max Operating Temperature=105°C, Max Voltage Rating (AC)=450V, Min Operating Temperature=-55°C, Package Quantity=1, Connector Type="Male Pin", Contact Material=Bronze, Contact Mating Length=0.23inch, Contact Plating=Tin, Contact Type="Male Pin", Depth=9.9mm, Gender=Male, Housing Color=Black, Housing Material=Polyester, Lead Free="Lead Free", Length=20.32mm, Mount="Through Hole", Number Of Contacts=8, Number of Positions=8, Number Of Rows=1, Orientation="Right Angle", Packaging=Bulk, Pitch=2.54mm, Radiation Hardening=No, REACH SVHC="No SVHC", RoHS Compliant=Yes, Series=TSW, Termination=Solder, Width=2.54mm
J?: library part CMP-03369-000080-1, "CONN HEADER VERT 2POS 6.35MM", Current Rating=12A, Manufacturer="TE Connectivity", Temperature="-40°C to +105°C", Temperature Range High=+105°C, Temperature Range Low=-40°C, Voltage Rating=600V, Automotive=No, Category=Conn, ComponentLink2Description=Datasheet, ComponentLink2URL=https://www.te.com/commerce/DocumentDelivery/DDEController?Action=showdoc&DocId=Customer+Drawing%7F350428%7FY2%7Fpdf%7FEnglish%7FENG_CD_350428_Y2.pdf%7F350428-1, Conn Gender=Male, Conn Orientation=Vertical, Contact Material=Gold,Nickel, Device Class L1=Connectors, Device Class L2="Headers and Wire Housings", Device Class L3=unset, Digikey Description="CONN HEADER VERT 2POS 6.35MM", Height=14.99mm, Lead Free=Yes, Manufacturer Part Number=350428-1, Mouser Description="Connector, Soft Shell; Universal MATE-N-LOK; 2; Nylon; Natural; 19 A; 600 VAC", Number Of Contacts=2, Number Of Rows=1, Octopart=https://octopart.com/350428-1-te+connectivity-46505355, Package=350428-1, Pitch=6.35mm, RoHS=TRUE, Standoff Height=0.63mm
L3V3 L5V: library part CMP-06042-007714-2, "Wire Wound Ferrite Inductor for Power Lines 22μH ±10% 0.923Ω 250mA 1210", Case Code (Imperial)=1210, Case Code (Metric)=3225, Current=80mA, Current Rating=250mA, DC Resistance (DCR)=710mR, Frequency=19MHz, Inductance=22uH, Max Operating Temperature=85°C, Min Operating Temperature=-40°C, Package Quantity=2000, Test Frequency=1MHz, Tolerance=10%, Case/Package=1210, Core Material=Ferrite, DC Current=250mA, Depth=2.7mm, Height=2mm, Lead Free="Lead Free", Length=3.2mm, Max DC Current=250mA, Military Standard=Not, Mount="Surface Mount", Packaging="Tape and Reel", Radiation Hardening=No, Rated Current-Max=250mA, RoHS Compliant=Yes, Self Resonant Frequency=19MHz, Series=LQH32C_23, Shielding=Unshielded, Termination=SMD/SMT, Weight=0.002116oz, Width=2.5mm
Memory: "FLASH - NOR Memory IC 128Mb (16M x 8) SPI - Quad I/O, QPI, DTR 133 MHz 8-SOIC", Package="SOIC-8 Winbond", Availability="In Stock", Check_prices=https://www.snapeda.com/parts/W25Q128JVSIQ/Winbond+Electronics/view-part/?ref=eda, MF="Winbond Electronics", MP=W25Q128JVSIQ, Price=None, Purchase-URL=https://pricing.snapeda.com/search/part/W25Q128JVSIQ/?ref=eda, SnapEDA_Link=https://www.snapeda.com/parts/W25Q128JVSIQ/Winbond+Electronics/view-part/?ref=snap
Pow_OUT: library part CMP-1024-00357-1, "0.025\" SQ Post Header, Through-hole, Vertical, -55 to 125 degC, 2.54 mm Pitch, 4-Pin, Male, RoHS", Manufacturer=Samtec, Temperature Range="-55 to 125 degC", ComponentLink1Description="Manufacturer URL", ComponentLink1URL=http://www.samtec.com, ComponentLink2Description=Datasheet, ComponentLink2URL=http://www.samtec.com/documents/webfiles/pdf/TSW_TH.PDF, ComponentLink3Description="Package Specification", ComponentLink3URL=http://www.samtec.com/documents/webfiles/cpdf/TSW-XXX-XX-XXX-X-XX-XXX-MKT.pdf, DatasheetVersion=F-214, Mounting Technology=Through-hole, Orientation=Vertical, PackageDescription=".025[0.64] SQ. Post Terminal Strip Assembly", PackageReference=TSW-104-08-X-S, PackageVersion="DM, 8/1988", PartNumber=TSW-104-08-G-S, Pitch="2.54 mm", RoHS=True
R_3V3 R_5V: library part CMP-2000-00318-1, Manufacturer=Panasonic, Part Number=ERJ-3EKF2002V
R_Den: library part CMP-009-00023-5, "Chip Resistor, 100 KOhm, +/- 1%, 0.1 W, -55 to 155 degC, 0603 (1608 Metric)", Case/Package=0603, Max Operating Temperature=155°C, Min Operating Temperature=-55°C, Power=100mW, Tolerance=1%, Voltage Rating=50V, Mounting Technology=SM, Pins=2, RoHS Compliant=True
R_DM R_DP: library part CMP-2002-00830-2, "RES SMD 27 OHM 1% 1/10W 0402", Case Code (Imperial)=0402, Case Code (Metric)=1005, Max Operating Temperature=155°C, Max Power Dissipation=100mW, Min Operating Temperature=-55°C, Package Quantity=1, Resistance=27R, Resistance Tolerance=1%, Resistor Type="Thick Film", Temperature Coefficient=100ppm/°C, Voltage Rating=50V, Case/Package=0402, Construction=Rectangular, Contact Plating=Tin, Depth=0.5mm, Features="Automotive AEC-Q200", Height=0.35mm, Lead Free="Lead Free", Length=1mm, Military Standard=Not, Mount="Surface Mount", Number of Pins=2, Number of Terminations=2, Packaging="Tape and Reel", Power Rating=100mW, Radiation Hardening=No, REACH SVHC="No SVHC", RoHS Compliant=Yes, Series=ERJ, Technology="THICK FILM", Termination=SMD/SMT, Tolerance=1%, Voltage Rating (DC)=50V, Weight=2.8E-05oz, Width=0.5mm
R_out: library part CMP-2000-00873-2, "RES SMD 1K OHM 0.1% 1/10W 0603", Case Code (Imperial)=0603, Case Code (Metric)=1608, Max Operating Temperature=155°C, Max Power Dissipation=100mW, Min Operating Temperature=-55°C, Package Quantity=5000, Resistance=1kR, Resistance Tolerance=0.1%, Resistor Type="Thin Film", Temperature Coefficient=25ppm/°C, Voltage Rating=75V, Case/Package=0603, Construction=Rectangular, Contact Plating=Tin, Depth=0.8mm, Height=0.45mm, Length=1.6mm, Military Standard=Not, Mount="Surface Mount", Number of Pins=2, Number of Terminations=2, Packaging="Tape and Reel", Power Rating=100mW, Radiation Hardening=No, REACH SVHC="No SVHC", RoHS Compliant=Yes, Series=ERA-3A, Size Code=0603, Technology="METAL FILM", Termination=SMD/SMT, Tolerance=0.1%, Width=0.8mm
RCS RCS? RSCL RSCL? RSDA RSDA? RSDO RSDO?: library part CMP-1012-00586-3, "Precision Thick Film Chip Resistor, 4.7 KOhm, +/- 1%, -55 to 155 degC, 0603 (1608 Metric), RoHS, Tape and Reel", Case Code (Imperial)=1206, Case Code (Metric)=3216, Case\Package=1205, Max Operating Temperature="125 degC", Min Operating Temperature="-55 degC", Package Quantity=1, Power Rating="250 mW", Resistance="220 Ohm", Tolerance=5%, Type (Resistor)="Thick Film", Voltage Rating="50 V", ComponentLink1Description="Manufacturer URL", ComponentLink1URL=http://www.panasonic.com/, ComponentLink2Description=Datasheet, ComponentLink2URL=http://industrial.panasonic.com/cdbs/www-data/pdf/RDA0000/AOA0000C86.pdf, DatasheetVersion=Apr-15, Elements=4, Height="0.024 inch", Length="0.126 inch", Mount="Surface Mount", PackageDescription="2-Pin Surface Mount Device, Body 1.6 x 0.85 mm", PackageReference=0603, Packaging="Tape and Reel", Pins=8, Radiation Hardening=No, REACH SVHC="No SVHC", RoHSCompliant=true, Width="0.063 inch"
RFB1: library part CMP-2000-03310-2, "RES Thick Film, 3.83kΩ, 1%, 0.1W, 100ppm/°C, 0603", Case Code (Imperial)=0603, Case Code (Metric)=1608, Max Operating Temperature=155°C, Max Power Dissipation=100mW, Min Operating Temperature=-55°C, Package Quantity=10, Resistance=3.83kR, Temperature Coefficient=100ppm/°C, Tolerance=1%, Voltage Rating=75V, Case/Package=0603, Composition="Thick Film", Contact Plating=Tin, Depth=0.85mm, Features="Automotive AEC-Q200", Height=0.45mm, Lead Free="Lead Free", Length=1.55mm, Military Standard=Not, Number of Pins=2, Number of Terminations=2, Packaging="Tape and Reel", Power Rating=100mW, Radiation Hardening=No, Termination=SMD/SMT, Voltage Rating (DC)=75V, Weight=7.1E-05oz, Width=0.85mm
RFB1RC: library part CMP-2000-00493-1, Manufacturer=Panasonic, Part Number=ERJ-3EKF4220V
RFB2: library part CMP-2000-03547-2, "RES Thick Film, 6.34kΩ, 1%, 0.1W, 100ppm/°C, 0603", Case Code (Imperial)=0603, Case Code (Metric)=1608, Max Operating Temperature=155°C, Max Power Dissipation=100mW, Min Operating Temperature=-55°C, Package Quantity=10, Resistance=6.34kR, Temperature Coefficient=100ppm/°C, Tolerance=1%, Voltage Rating=75V, Case/Package=0603, Composition="Thick Film", Contact Plating=Tin, Depth=0.85mm, Features="Automotive AEC-Q200", Height=0.45mm, Length=1.55mm, Military Standard=Not, Number of Pins=2, Number of Terminations=2, Packaging="Tape and Reel", Power Rating=100mW, Radiation Hardening=No, Termination=SMD/SMT, Weight=7.1E-05oz, Width=0.033inch
RFB2RC: library part CMP-1012-00493-2, Manufacturer="Vishay Dale", Part Number=CRCW0603698RFKEA
RP: "RP2040 chip for Raspberry Pi Pico - ARMÂ® CortexÂ®-M0+ MCU 32-Bit", Package=None, Availability="In Stock", Check_prices=https://www.snapeda.com/parts/RP2040/Raspberry+Pi/view-part/?ref=eda, MF="Raspberry Pi", MP=RP2040, Price=None, Purchase-URL=https://pricing.snapeda.com/search/part/RP2040/?ref=eda, SnapEDA_Link=https://www.snapeda.com/parts/RP2040/Raspberry+Pi/view-part/?ref=snap
RSW1 RSW2: library part CMP-1012-00623-3, "Chip Resistor, 10 KOhm, +/- 1%, 0.1 W, -55 to 155 degC, 0603 (1608 Metric), RoHS, Tape and Reel", Case Code (Imperial)=0603, Case Code (Metric)=1608, Manufacturer=Panasonic, Max Operating Temperature=155degC, Max Power Dissipation=100mW, Min Operating Temperature=-55degC, Package Description="2-Pin Surface Mount Device, Body 1.6 x 0.85 mm", Package Quantity=1, Package Reference=603, Resistance=10KOhm, Temperature Coefficient=100ppm\/degreesC, Tolerance=1%, Voltage Rating=75V, Case\/Package=0603, Composition=ThickFilm, Contact Plating=Tin, Datasheet URL=https://industrial.panasonic.com/cdbs/www-data/pdf/RDA0000/AOA0000C304.pdf, Datasheet Version=02/2017, Depth=0.8mm, Height=0.45mm, Lead Free=LeadFree, Length=1.6mm, Manufacturer URL=http://www.panasonic.com/, Military Standard=Not, Mount=SurfaceMount, Mounting Technology=SurfaceMount, Number of Pins=2, Number of Terminations=2, Packaging=TapeandReel, Power Rating=100mW, Radiation Hardening=No, REACH SVHC=NoSVHC, RoHSCompliant=true, Termination=SMD/SMT, Voltage Rating (DC)=75V, Width=0.031inch
U?: Package=None, Availability=Unavailable, MP=TPS54283PWPR, Price=None
USB: library part CMP-2000-05827-1, "Micro-USB B Receptacle, Right Angle, Bottom Mount, Surface Mount, with Solder Tabs, -30 to 85 degC, 5-Pin USB, RoHS, Tape and Reel", Manufacturer=Molex, Package Description="5-Leads USB, Micro B, Body 7.5 x 5 mm, Pitch 0.65 mm", Package Reference=MICRO-B, Package Version="Rev. F, 12/2012", Standard Package=1, Voltage - Max=30V, 3D Model=105017-0001.stp, Catalog Drawings=1050170001, Category=Connectors,Interconnects, Circuits=5, Connector Type=USB-microB, Datasheet URL=http://www.molex.com/elqNow/elqRedir.htm?ref=http://www.molex.com/webdocs/datasheets/pdf/en-us/1050170001_IO_CONNECTORS.pdf, Datasheet Version=03/2016, Family=USB,DVI,HDMIConnectors, Featured Product=Micro-USBConnectorsUSBConnectors, Features=Shielded,SolderRetention, Gender=Receptacle, Ingress Protection=-, Manufacturer URL=http://www.molex.com/, Mating Products=WM17145-ND-CABLEMICROUSBBTOSTDA1.0MWM17147-ND-CABLEMICROUSBBTOSTDA2.0MWM17146-ND-CABLEMICROUSBBTOSTDA1.5M, Mounting Technology=SurfaceMount, Mounting Type=BoardCutout,SurfaceMount,RightAngle, Number Of Contacts=5, Online Catalog=Molex-MicroUSB, Other Names=WM1399DKR, Package URL=http://www.molex.com/pdm_docs/sd/1050170001_sd.pdf, Packaging=Digi-Reel®, PCN Assembly/Origin=ResinSupplier21/Oct/2015, RoHS Information=1050170001CertofCompliance, Series=-, Specifications=-
Y?: library part CMP-2000-05039-3, "Crystal 12MHz ±20ppm (Tol) ±30ppm (Stability) 18pF FUND 120Ω 4-Pin SMD T/R", Case/Package=CSMD, ESR (Equivalent Series Resistance)=120R, Frequency=12MHz, Frequency Stability=30ppm, Frequency Tolerance=20ppm, Load Capacitance=18pF, Max Operating Temperature=85°C, Min Operating Temperature=-40°C, Operating Frequency="12 MHz", Package Quantity=1000, Depth=2.5mm, Height=1mm, Lead Free="Lead Free", Length=3.2mm, Mount="Surface Mount", Number of Pins=4, Packaging="Tape and Reel", Radiation Hardening=No, Series=ABM8G, Series Resistance=120R, Termination=SMD/SMT, Tolerance=20ppm, Width=2.5mm

## Free pads (board coordinates)
  round 157.48 hole 118.11: 2(2460,2165.35) 2(2460,3795) 2(3818.9,2165.35) 2(3818.9,3795)

## Via types
v1: diameter 30, hole 15, Top Layer to Bottom Layer, 21 vias
v2: diameter 50, hole 28, Top Layer to Bottom Layer, 6 vias
v3: diameter 30, hole 20, Top Layer to Bottom Layer, 3 vias

## Nets (pads, with @x,y where several pads share a name; then routed paths per layer and width w, separated by ;. In a path a pad name is that pad's centre, name@x,y a point inside that pad or via, vN(x,y) a via of type N, cw(c..) or ccw(c..) an arc to the next point about the centre after c; other vN are vias at no path point)
3V3: Acc.3 Acc.7 C_3V3.2 C_3V32.2 C_m.1 C_VDD.1 Gyr.1 Gyr.15 Gyr.16 L3V3.2 Memory.8 Pow_OUT.4 R_3V3.1 RCS.2 RCS?.2 RP.44 RSCL.2 RSCL?.2 RSDA.2 RSDA?.2 RSDO.2 RSDO?.2 | length 1395.2
  Top Layer w10: v1(2750,2880) RCS.2 ; v1(2840,3010) 2874.53,3010 RSDO.2 ; RSDA.2 v1(2960,3060) ; Gyr.15 Gyr.16 2973.23,2804.37 2966.26,2811.34 2964.45,2811.34 2964.37,2811.42 Gyr.1 2997.82,2813.23 3009.59,2825 v3(3015,2825) 3015,2830.41 3029.53,2844.94 RSCL.2 ; Gyr.16@2975.12,2784.76 2975.35,2785 v3(3005,2785) ; v1(3170,3510) 3170.81,3510.81 3170.81,3559.43 RP.44 ; RSDO?.2 3324.25,3576.22 3316.12,3576.22 v1(3312.29,3580.05) 3317.7,3580.05 3328.95,3591.3 3341.77,3591.3 RCS?.2 ; v1(3430,3385) RSDA?.2 3432.37,3427.84 3457.84,3427.84 ; Acc.3 3493.58,3488.43 3486.33,3488.43 3470,3472.1 3470,3440 3457.84,3427.84 ; Acc.7@3555.51,3468.74 3555.51,3466.61 3555.51,3440 3543.35,3427.84 3457.84,3427.84 ; RSCL?.2 3630,3625.47 v1(3630,3665)
  Top Layer w15: Acc.7@3555.51,3466.61 v2@3712.57,3466.61
  Top Layer w30: C_3V3.2 C_3V32.2 v3(2940,2465) ; L3V3.2 2884.43,2429.62 2917.63,2429.62 2928.82,2440.81 2985.65,2440.81 2985.79,2440.67 2988.74,2440.67 2991.46,2437.95 R_3V3.1 ; v2(2945,3935) C_m.1 3003.86,3931.42 3003.86,3858.58 3000.28,3855 Memory.8
  other v2: 3715,3464.18
5V: C_5V1.2 C_5V.2 L5V.2 Pow_OUT.2 R_5V.2 | length 1469.7
  Top Layer w10: C_5V1.2@3383.85,2538.85 C_5V1.2 C_5V1.2@3395.84,2538.85
  Top Layer w20: R_5V.2 3343.54,2498.54 C_5V1.2@3383.85,2538.85 ; L5V.2 3422.54,2474.94 3422.54,2512.15 3395.84,2538.85 C_5V.2
  Top Layer w50: Pow_OUT.2 3197.11,1982.89 3197.11,1957.69 3230.31,1924.49 3337.94,1924.49 3338.45,1925 3465,1925 3670,2130 3670,2430 3625.06,2474.94 3422.54,2474.94
Boot1: C5V.1 CSW1.2 DSW1.1 U?.2 U?.3 | length 343.8
  Top Layer w10: U?.2 3392.72,2243.82 C5V.1 ; CSW1.2 CSW1.2@3401.54,2170.16 ; DSW1.1@3548.62,2168.62 DSW1.1
  Top Layer w30: CSW1.2 DSW1.1@3548.62,2168.62 ; CSW1.2@3401.54,2170.16 C5V.1
Boot2: C3V3.1 CSW2.2 DSW2.1 U?.12 U?.13 | length 491.3
  Top Layer w10: CSW2.2 CSW2.2@2998.46,2162.09
  Top Layer w20: C3V3.1 2998.46,2220.95 3012.09,2234.58 3037.5,2234.58 3046.74,2243.82 U?.13
  Top Layer w30: DSW2.1 2742.5,2305 2762.5,2285 2762.5,2257.5 2861.38,2158.62 CSW2.2 ; CSW2.2@2998.46,2162.09 C3V3.1
CS1: Gyr.5 RCS.1 RP.3 | length 810.5
  Top Layer w10: RCS.1 2863.23,2866.3 2863.23,2846.77 2885.63,2824.37 Gyr.5 ; RCS.1@2850.52,2879.01 2850.52,2888.7 2840.83,2888.7 2835.83,2893.7 2835.83,2899.17 2810,2925 2810,3410 2895.87,3495.87 RP.3
CS2: Acc.10 RP.41 RSCL?.1 | length 500.3
  Top Layer w10: RP.41 3221.3,3512.68 3242.27,3512.68 3254.59,3525 v1(3260,3525) ; v1(3525,3625) RSCL?.1 3570.47,3543.67 3557.4,3530.59 3557.4,3529.61 3556.5,3528.7 Acc.10
  Bottom Layer w10: v1(3260,3525) 3285,3550 3380,3550 3455,3625 v1(3525,3625)
GND: Acc.8 Acc.9 C_3V3.1 C_3V32.1 C_5V1.1 C_5V.1 C_alim2_1.1 C_alim2_2.2 C_Alim.2 C_BP.2 C_C1.2 C_C2.2 C_Cap.2 C_m.2 C_VDD.2 CFB1RC.1 CFB2RC.2 DSW1.2 DSW2.2 Gyr.9 Gyr.10 Gyr.11 Gyr.12 Gyr.13 J?.2@2395,3110 Memory.4 pad.2 Pow_OUT.1 Pow_OUT.3 R_Den.1 RFB1.2 RFB2.2 RP.57 RSW1.1 RSW2.1 U?.4 U?.15 USB.5 USB.6 USB.7 USB.8 USB.9 USB.10 USB.11 Y?.2 Y?.4 | length 112.5
  Top Layer w10: Y?.2 3174.84,3045 v1(3230,3045) ; C_VDD.2 3640.47,3550 v1(3695,3550)
NetC3V3_2: C3V3.2 L3V3.1 | length 145.4
  Top Layer w10: 2880,2307.89 2881.88,2309.77 2881.88,2322.75 L3V3.1 ; C3V3.2@2920.31,2231.23 C3V3.2
  Top Layer w20: 2880,2307.89 2880,2250 2898.77,2231.23 C3V3.2@2920.31,2231.23
NetC5V_2: C5V.2 L5V.1 | length 120.3
  Top Layer w20: L5V.1 3468.46,2297.32 C5V.2
NetC_BP_1: C_BP.1 U?.11 | length 62.9
  Top Layer w10: C_BP.1 U?.11
NetC_Cap_1: C_Cap.1 Gyr.14 | length 49.6
  Top Layer w10: Gyr.14 3013.23,2745.32 C_Cap.1
NetCFB1RC_2: CFB1RC.2 RFB1RC.2 | length 61.3
  Top Layer w10: RFB1RC.2 3296.85,2554.61 CFB1RC.2
NetCFB2RC_1: CFB2RC.1 RFB2RC.2 | length 55
  Top Layer w10: RFB2RC.2 CFB2RC.1
NetCSW1_1: CSW1.1 RSW1.2 | length 58
  Top Layer w10: CSW1.1 3399.41,2120.79 RSW1.2 RSW1.2@3400.39,2064.02
NetCSW2_1: CSW2.1 RSW2.2 | length 57.1
  Top Layer w10: RSW2.2 2946.97,2111.38 CSW2.1
NetGyr_8: Gyr.8 R_Den.2 | length 57.4
  Top Layer w10: R_Den.2 2874.65,2745 2874.96,2745.32 Gyr.8
NetR_3V3_2: R_3V3.2 RFB2.1 RFB2RC.1 U?.8 | length 274.9
  Top Layer w10: R_3V3.2 R_3V3.2@3048.54,2437.95
  Top Layer w25: RFB2RC.1 3032.95,2535.39 3036.2,2532.15 3036.2,2498.8 3048.54,2486.46 3048.54,2449.67 3048.54,2437.95 3053.76,2443.17 3067.48,2443.17 3068.4,2444.09 RFB2.1 ; R_3V3.2 3050.43,2433.11 3050.43,2388.7 3067.36,2371.77 U?.8
NetR_5V_1: R_5V.1 RFB1.1 RFB1RC.1 U?.7 | length 240.9
  Top Layer w10: RFB1.1 RFB1.1@3185.19,2505.58 ; RFB1RC.1@3239.81,2505.58 RFB1RC.1
  Top Layer w20: U?.7 R_5V.1@3300.24,2441.22
  Top Layer w25: RFB1.1@3185.19,2505.58 RFB1RC.1@3239.81,2505.58 ; RFB1RC.1 3240,2455 3253.78,2441.22 R_5V.1@3300.24,2441.22
NetR_DM_1: R_DM.1 RP.46 | length 53
  Top Layer w10: RP.46 3141.18,3561.3 3141.18,3579.59 3157.61,3596.01 3158.82,3596.01 R_DM.1
NetR_DP_1: R_DP.1 RP.47 | length 50
  Top Layer w10: R_DP.1 3105.08,3602.2 3123.31,3583.98 3123.31,3561.3 RP.47
NetR_out_2: R_out.2 RP.21 | length 69.6
  Top Layer w10: RP.21 3077.13,3266.03 3096.69,3246.46 3098.17,3246.46 R_out.2
QSPI_SCLK: Memory.6 RP.52 | length 228.9
  Top Layer w10: Memory.6 3012.2,3755 3045.63,3721.57 RP.52
QSPI_SD0: Memory.5 RP.53 | length 172.4
  Top Layer w10: Memory.5 3012.2,3705 3018.62,3698.58 3018.62,3695.73 3029.88,3684.47 3029.88,3659.32 RP.53
QSPI_SD1: Memory.2 RP.55 | length 532.4
  Top Layer w10: Memory.2 2687.8,3805 2666.38,3783.58 2666.38,3683.62 2763.23,3586.77 2990.14,3586.77 2997.32,3579.59 RP.55@2997.32,3571.77
QSPI_SD2: Memory.3 RP.54 | length 407.6
  Top Layer w10: Memory.3 2713.43,3749.64 2745.36,3749.64 2893.23,3601.77 3008.28,3601.77 3014.13,3595.91 RP.54
QSPI_SD3: Memory.7 RP.51 | length 285.4
  Top Layer w10: Memory.7 3012.2,3805 3061.38,3755.83 RP.51
QSPI_SS: Memory.1 RP.56 | length 587.3
  Top Layer w10: Memory.1 2687.8,3855 2651.38,3818.58 2651.38,3677.41 2758,3570.79 RP.56@2981.57,3570.79
SCL: Gyr.2 RP.4 RSCL.1 | length 766.2
  Top Layer w10: v1(2895,3120) 2895,3449.11 2924.95,3479.06 RP.4@2938.23,3479.06 ; Gyr.2 2944.68,2824.68 2970.47,2850.47 RSCL.1 2983.79,2893.31 2983.79,2908.79 v1(3005,2930)
  Bottom Layer w10: v1(2895,3120) 2895,3070 3010,2955 3010,2935 v1(3005,2930)
SCX: Acc.12 RCS?.1 RP.38 | length 542
  Top Layer w10: RP.38 3238.57,3464.37 3256.78,3446.16 v1(3262.2,3446.16) ; RCS?.1@3429.53,3605 3479.64,3605 3514.25,3570.39 3514.25,3530.59 Acc.12
  Bottom Layer w10: v1(3262.2,3446.16) 3456.16,3446.16 3496.95,3486.95 v1(3496.95,3587.7)
SDA: Gyr.3 RP.5 RSDA.1 | length 726.4
  Top Layer w10: Gyr.3 2925,2923.95 ; RP.5 2948.7,3463.31 2930.41,3463.31 2915,3447.9 2915,3323.36 2925,3313.36 2925,2923.95 ; RSDA.1 2951.53,2950.47 2925,2923.95
SDA2: Acc.2 RP.39 RSDA?.1 | length 286.7
  Top Layer w10: RP.39 3220.3,3480.06 3304.94,3480.06 v1(3305,3480) 3307.5,3482.5 3377.5,3482.5 v1(3380,3485) 3429.53,3485 RSDA?.1 3453.59,3508.11 3493.58,3508.11 Acc.2
SDO: Gyr.4 RP.2 RSDO.1 | length 853.6
  Top Layer w10: v1(2855.86,3408.46) 2855.86,3089.14 2905.32,3039.68 2905.32,2930.91 ; v1(2860,3515) 2863.39,3511.61 RP.2 ; RSDO.1 2888.7,2936.77 2899.46,2936.77 2905.32,2930.91 ; Gyr.4 2905.32,2930.91
  Bottom Layer w10: v1(2855.86,3408.46) 2857.93,3410.53 2857.93,3512.93 v1(2860,3515)
SDO2: Acc.1 RP.40 RSDO?.1 | length 327
  Top Layer w10: RP.40 3280.87,3495.87 v1(3305,3520) ; RSDO?.1@3429.53,3545 3455,3545 v1(3455.18,3544.82) ; v1@3455.18,3545 3460.41,3545 3475.8,3529.61 3493.58,3529.61 Acc.1
  Bottom Layer w10: v1(3305,3520) 3430.36,3520 v1(3455.18,3544.82)
USB_D+: R_DP.2 USB.3 | length 832.2
  Top Layer w10: USB.3 2469.3,3525 2502.35,3491.95 2502.35,3477.65 v2(2510,3470) ; R_DP.2 v2(3105,3680)
  Bottom Layer w10: v2(2510,3470) 2520,3470 2730,3680 v2(3105,3680)
USB_D-: R_DM.2 USB.2 | length 915.2
  Top Layer w10: USB.2 2486.27,3550.59 2502.15,3534.72 v2(2512.97,3534.72) ; R_DM.2 v2(3165,3680)
  Bottom Layer w10: v2(2512.97,3534.72) 2513.32,3534.72 2596.33,3617.72 2723.6,3745 3135,3745 3165,3715 v2(3165,3680)
VBUS: C_alim2_1.2 C_alim2_2.1 C_Alim.1 J?.1@2395,2860 U?.1 U?.14 USB.1 | length 2842.7
  Top Layer w10: USB.1@2431.7,3574.73 USB.1 USB.1@2451.85,3576.18 ; U?.14@3061.37,2217.32 3062.28,2218.23 U?.14 ; U?.1 3312.72,2218.23 U?.1@3313.63,2217.32
  Top Layer w20: C_alim2_1.2 U?.14@3061.37,2217.32 ; C_alim2_2.1 U?.1@3313.63,2217.32
  Top Layer w30: 2460,3578.46 2483.46,3578.46 2500,3595 2545,3595 2634.62,3505.38 2634.62,3099.62 2395,2860 2395,2440 2670.04,2164.96 C_Alim.1@2678.7,2164.96 ; C_Alim.1 C_Alim.1@2678.7,2164.96 ; 3061.37,2060 C_alim2_1.2 ; C_alim2_2.1 3313.63,2072.57 3296.06,2055 3061.37,2055 2865,2055 2755.04,2164.96 C_Alim.1@2678.7,2164.96
XIN: C_C1.1 RP.20 Y?.1 | length 282
  Top Layer w10: RP.20 3061.38,3245.71 3043.62,3227.95 3043.62,3222.05 3030,3208.43 3030,3099.29 3082.76,3046.54 Y?.1
XOUT: C_C2.1 R_out.1 Y?.3 | length 129.5
  Top Layer w10: R_out.1 3176.01,3185.37 C_C2.1 Y?.3@3176.38,3122.05
pads on no net: Acc.4 Acc.5 Acc.6 Acc.11 Gyr.6 Gyr.7 J?.1@3845,3335 J?.2@3845,3235 J?.3 J?.4 J?.5 J?.6 J?.7 J?.8 RP.1 RP.6 RP.7 RP.8 RP.9 RP.10 RP.11 RP.12 RP.13 RP.14 RP.15 RP.16 RP.17 RP.18 RP.19 RP.22 RP.23 RP.24 RP.25 RP.26 RP.27 RP.28 RP.29 RP.30 RP.31 RP.32 RP.33 RP.34 RP.35 RP.36 RP.37 RP.42 RP.43 RP.45 RP.48 RP.49 RP.50 U?.5 U?.6 U?.9 U?.10 U?.16 U?.17 U?.18 U?.19 U?.20 U?.21 USB.4

## Polygon pours and split planes (outlines as drawn)
GND on Top Layer "GND_L01_P003" (solid, pour order 3): 2230,2225 2230,3735 cw(c3137.5,2827.5) 4045,3735 4045,2225 cw(c3137.5,3132.5)
3V3 on Bottom Layer "3V3_L02_P004" (solid, pour order 4): 2230,2225 2230,3735 cw(c3137.5,2827.5) 4045,3735 4045,2225 cw(c3137.5,3132.5)

## Silkscreen, mask and mechanical layers (free items; w line width, h text height)
Top Overlay:
  drawing of 24 lines, arcs and shapes, not listed
  text "microC" at 2670,3240 h40
  text "INDRA" at 3475,2740 h40
  text "V1.1" at 3500,2680 h40
  text "D.P." at 3900,2245 h40
Mechanical 13:
  the board outline again, w10

## Text inside footprints (layer, text, board x,y; h text height)
USB: Mechanical 1 "PCB EDGE" at 2265.83,3808.46 h11.81 r270